# Altium PCB GSMMHMUltraSlim.PcbDoc
Units mm, origin at the board's own origin, x right, y up, seen from the top; angles counter-clockwise.
Board outline 30 x 20 mm, 2 copper layers (Top Layer, Bottom Layer); 23 components, 31 nets, 143 pads, 100 vias.
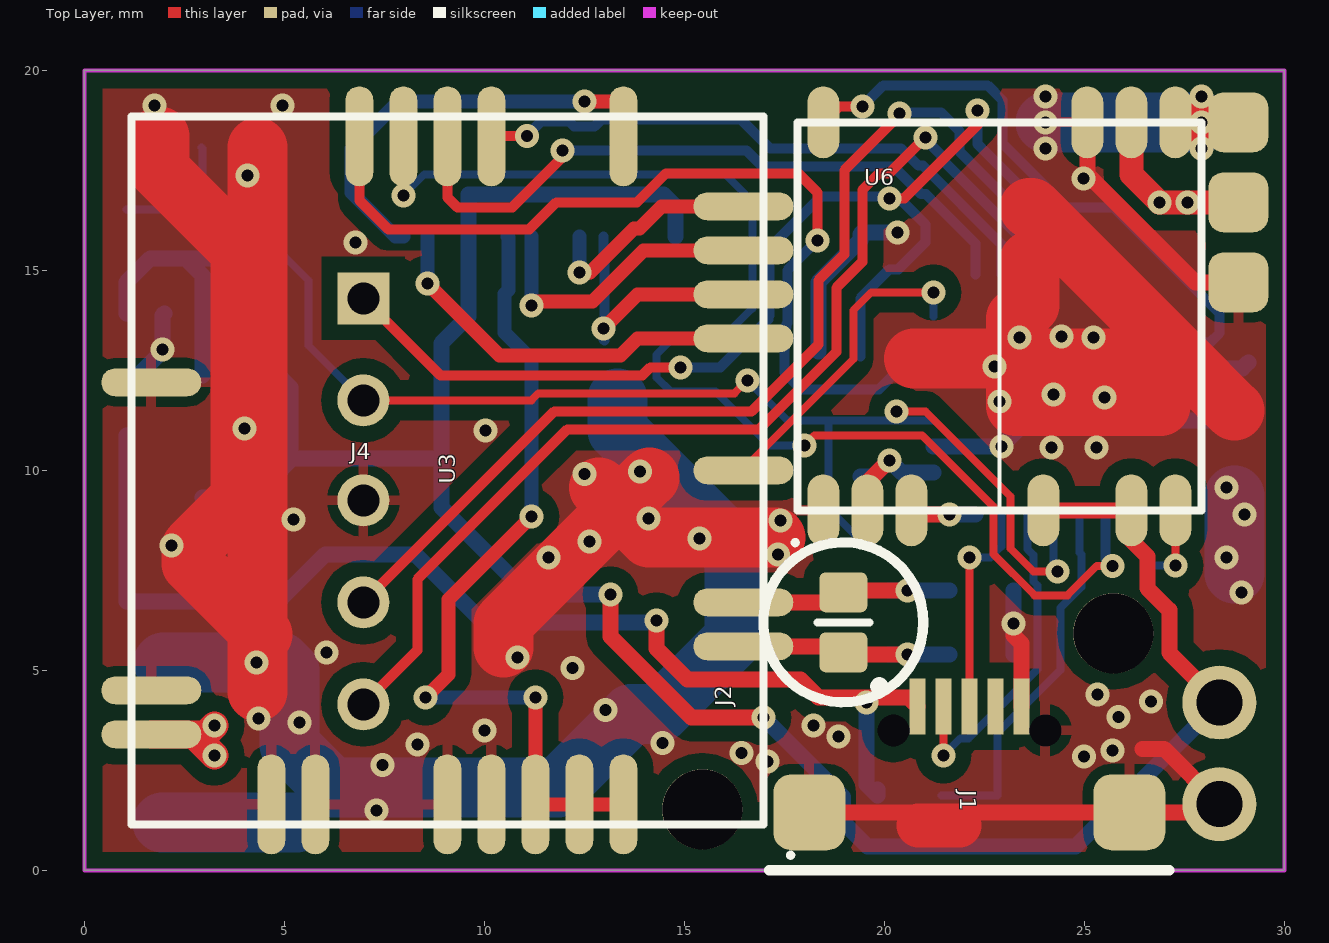
[diagram p0: Top Layer view]
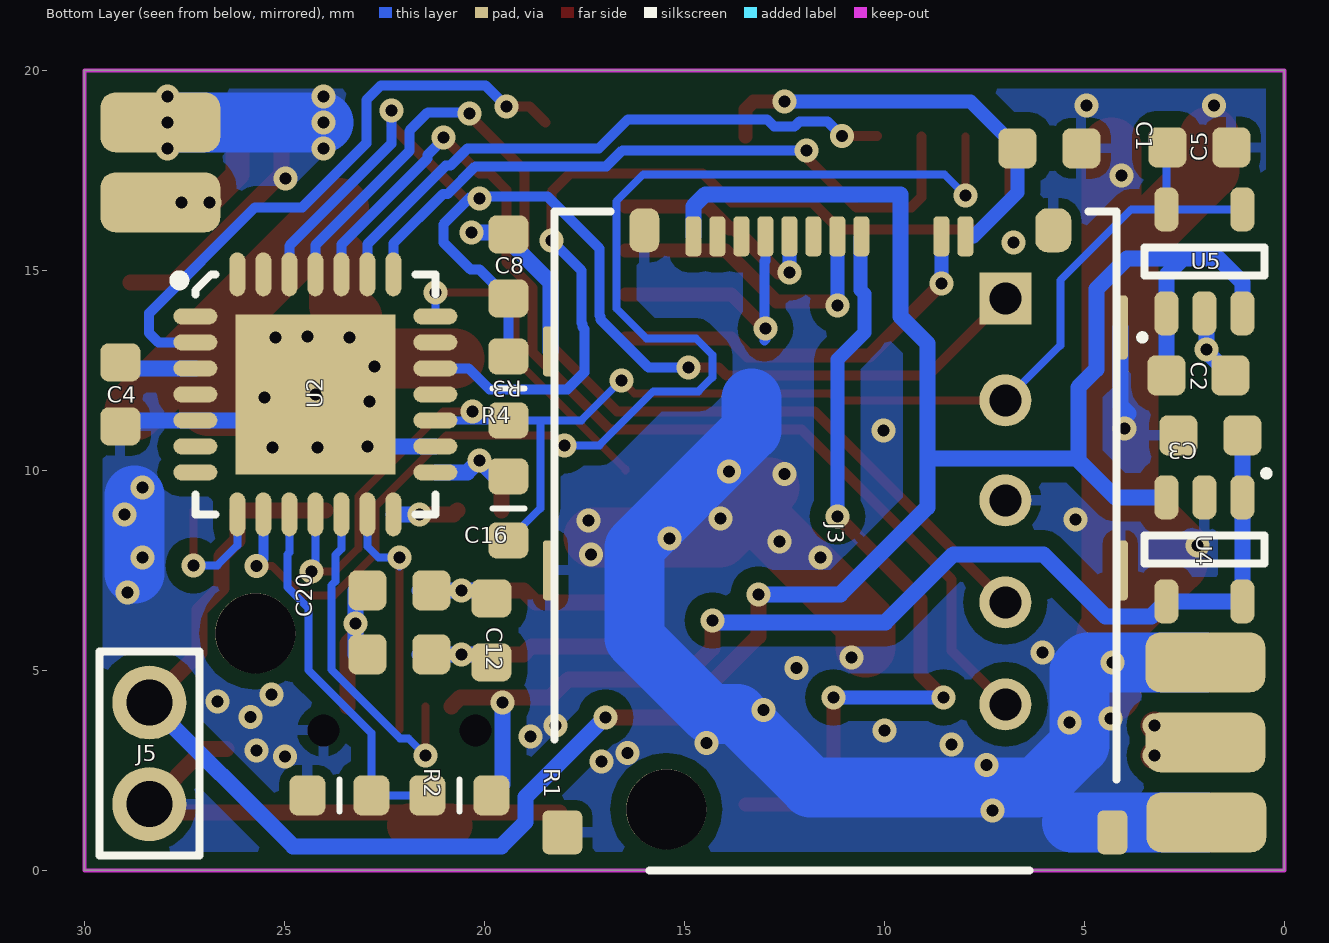
[diagram p1: Bottom Layer view, seen from below]
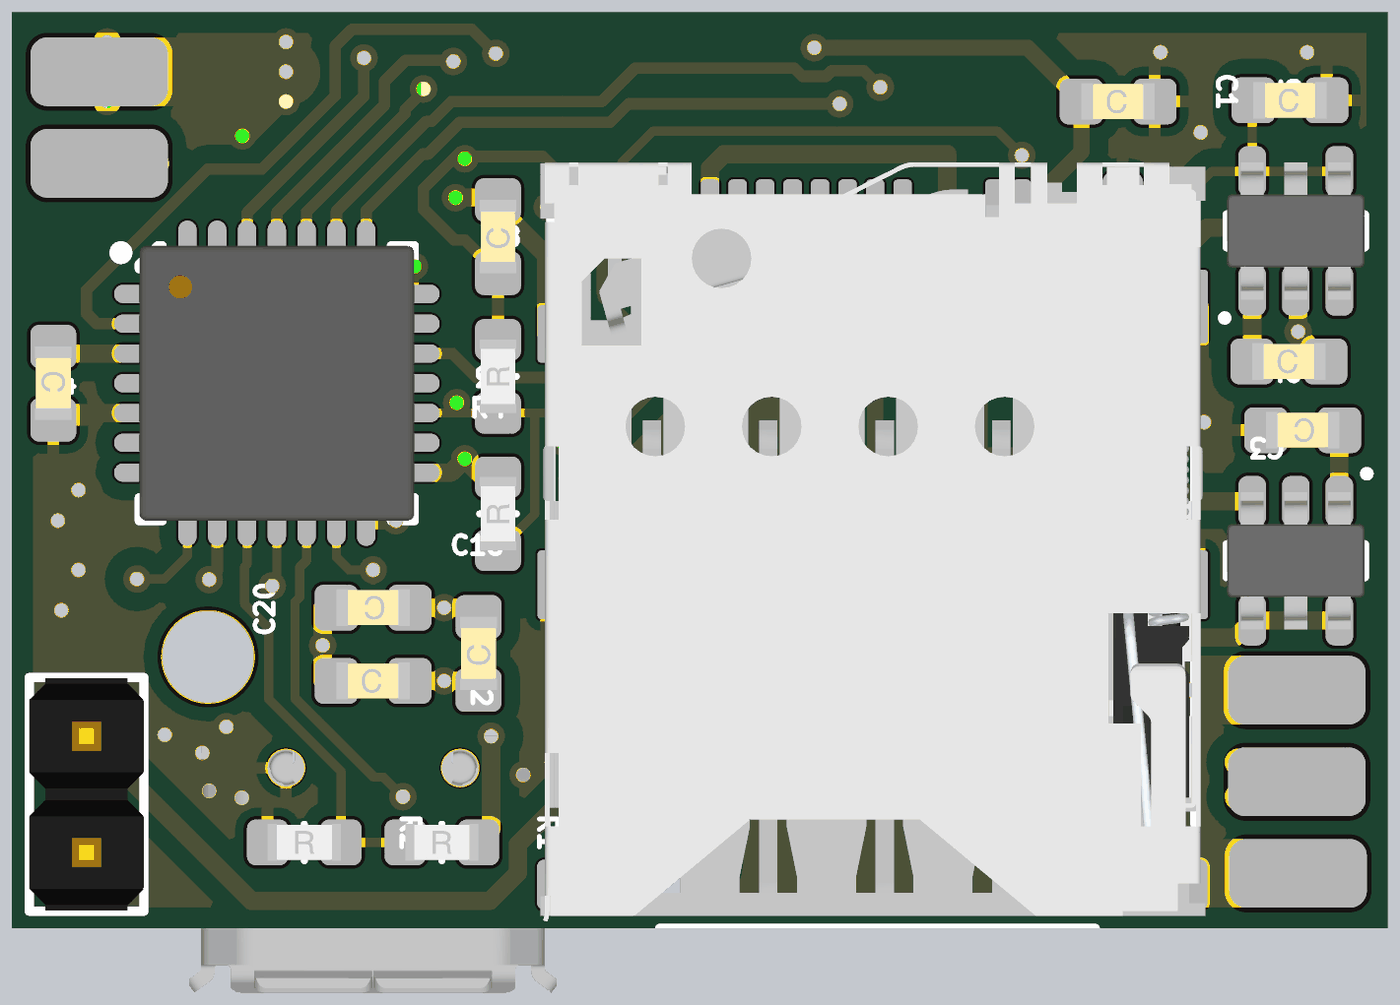
[diagram p2: 3D render of the assembled board from below, using the file's embedded part models]

## Layer stack, top to bottom
Top Solder: solder mask 0.0102, Solder Resist, Dk 3.5
Top Layer: signal copper 0.0356
Dielectric 1: dielectric 0.32, FR-4, Dk 4.8
Bottom Layer: signal copper 0.0356
Bottom Solder: solder mask 0.0102, Solder Resist, Dk 3.5

## Board outline
0,0 0,20 30,20 30,0

## Design rules (kind name [scope] priority, off if disabled: settings)
Clearance Clearance_110V_Keepout [InNetClass('110V') vs OnLayer('Keep-Out Layer')] p1: gap=0.3
Clearance Clearance_Q1Q2Q3 [(InComponent('Q1') OR InComponent('Q2') OR InComponent('Q3')) vs (InComponent('Q1') OR InComponent('Q2') OR InComponent('Q3'))] p2: gap=1
Clearance Clearance_110V_NoNet [InNetClass('110V') vs InNet('No Net')] p3: gap=0.5
Clearance Clearance_220V_110V [InNetClass('220V') vs InNetClass('110V')] p4: gap=1
Clearance Clearance_240VAC_220V [InNet('240VAC') vs InNetClass('220V')] p5: gap=1
Clearance Clearance_Poly [All vs InPolygon] p6: gap=0.4
Clearance Clearance_TrackAll [All vs IsTrack] p7: gap=0.2
Clearance Clearance_TrackU4 [InComponent('U4') vs IsTrack] p8: gap=0.25
Clearance Clearance_220V [InNetClass('220V')] p9: gap=2
Clearance Clearance_110V [InNetClass('110V')] p10: gap=1
Clearance [All] p11: gap=0.2
ComponentClearance [All] p1 off: gap=0.254 collisioncheckmode=3 verticalgap=0.254 showdistances=FALSE
Height [All] p1 off: minheight=0 maxheight=25.4 prefheight=12.7
PolygonConnect PolygonConnect_GND [All vs IsVia] p1: connectstyle=Direct reliefconductorwidth=0.254 reliefentries=4 polygonreliefangle="90 Angle" airgapwidth=0.254
PolygonConnect [All] p2: connectstyle=Relief reliefconductorwidth=0.254 reliefentries=4 polygonreliefangle="90 Angle" airgapwidth=0.254
RoomDefinition GSMMHMUltraSlim [InComponentClass('GSMMHMUltraSlim')] p1 off: confinementstyle=ConfineIn formatcopy=TRUE lockcomponents=FALSE outline 152.543,1.651 410.48,1.651 410.48,36.449 152.543,36.449
RoutingVias [All] p1: holewidth=0.711 width=1.27 viastyle="Through Hole" minholewidth=0.711 minwidth=1.27 maxholewidth=0.711 maxwidth=1.27
SolderMaskExpansion [All] p1: expansion=0.102
UnpouredPolygon [All] p1: allowunpoured=FALSE
Width [All] p1: maxlimit=5 minlimit=0.2 preferedwidth=0.5
27 further rules are at their usual default settings.

## Components (designator, comment, footprint, x,y, rotation, side; value= is the part's Value field where it differs from the comment)
C1 "1uF" SMD_0603_CAPC1608X95N 5.875,18.05 r180 bottom
C2 "1uF" SMD_0603_CAPC1608X95N 2.15,12.375 r180 bottom
C3 "1uF" SMD_0603_CAPC1608X95N 1.85,10.875 r0 bottom
C4 "4.7uF" SMD_0603_CAPC1608X95N 29.1,11.9 r270 bottom
C5 "4.7uF" SMD_0603_CAPC1608X95N 2.125,18.075 r180 bottom
C8 "100nF" SMD_0603_CAPC1608X95N 19.4,15.1 r90 bottom
C12 "33pF" SMD_0603_CAPC1608X95N 22.125,5.4 r180 bottom
C16 "33pF" SMD_0603_CAPC1608X95N 19.825,6 r90 bottom
C20 "33pF" SMD_0603_CAPC1608X95N 22.125,7 r0 bottom
J1 "ATTEND 207A-BBA0-R" SMD_CON_MICRO_USB 22.125,4.1 r270 top
J2 "CON_2PINS" SMD_MIC_4MM 18.975,6.2 r90 top
J3 "MICRO SIM" SMD_CON-WURTH_MICRO_SIM_693021010811 11.225,16.35 r180 bottom
J4 "CON_5PINS" "SIP5 - PGM" 6.975,9.225 r270 top
J5 "CON_2PINS" PTH_HDRV02W64P254_1X02 28.375,2.925 r90 bottom
R1 "20k" SMD_0603_RESC1608X55N 20.625,1.875 r180 bottom
R2 "20k" SMD_0603_RESC1608X55N 23.625,1.875 r180 bottom
R3 "2k" SMD_0603_RESC1608X55N 19.4,12.05 r90 bottom
R4 "20k" SMD_0603_RESC1608X55N 19.4,9.05 r90 bottom
U2 "PIC18F27J53_QFN" SMD_QFN65P600X600X100-29AN 24.225,11.9 r180 bottom
U3 "QUECTEL_M66" "SMD_MOD_M66-44N - NO UNUSED PINS" 9.075,10 r180 top
U4 "MCP73811 450mA" "SMD_SOT26_SOT95P285X140-5N - DLV" 2,8.025 r270 bottom
U5 "BU33TD3WG" "SMD_SOT26_SOT95P285X140-5N - DLV" 2,15.225 r90 bottom
U6 "QUECTEL_L76" "SMD_MOD_L76_SOIC110P970X1010-18N - NO UNUSED PINS" 22.875,13.85 r90 top

## Footprints (in the part's own frame and the unit in brackets; to place one, negate y for a bottom-side part, rotate by r counter-clockwise, add the part's x,y. Pads: shape width x height; smd on the part's side, far side on the other; paste and mask are expansions set on the pad)
PTH_HDRV02W64P254_1X02 [mm]
  round 1.85 hole 1.15 mask+0.075: 1(-1.27,0) 2(1.27,0)
  silkscreen extent -2.55,-1.25 2.55,1.25, body extent -2.54,-1.25 2.54,1.25, height 8
"SIP5 - PGM" [mm]
  rect 1.3x1.3 hole 0.8: 1(-5.075,0)
  round 1.3 hole 0.8: 2(-2.525,0) 3(-0.025,0) 4(2.525,0) 5(5.075,0)
SMD_0603_CAPC1608X95N [mm]
  rrect42% 0.95x1 smd mask+0.075: 1(-0.8,0) 2(0.8,0)
  body extent -0.8,-0.4 0.8,0.4, height 0.95
SMD_0603_RESC1608X55N [mm]
  rrect44% 0.9x1 smd mask+0.075: 1(-0.8,0) 2(0.8,0)
  silkscreen extent 0,-0.4 0,0.4, body extent -0.8,-0.4 0.8,0.4, height 0.55
SMD_CON-WURTH_MICRO_SIM_693021010811 [mm] "WURTH Micro SIM 693021010811"
  rrect50% 0.4x1 smd mask+0.05: 1(3.25,-0.5) 2(0.05,-0.5) 3(-1.15,-0.5) 4(-2.35,-0.5) 5(2.65,-0.5) 6(-0.55,-0.5) 7(-1.75,-0.5) 8(-2.95,-0.5) 9(-3.55,-0.5) 10(0.65,-0.5)
  rrect67% 0.75x1.1 smd mask+0.05: 11(-4.775,-0.35)
  rrect67% 0.9x1.1 smd mask+0.05: 12(5.45,-0.35)
  rrect44% 0.375x1.6 smd mask+0.05: 13(7.125,-2.775)
  rrect44% 0.375x1.5 smd mask+0.05: 14(7.125,-8.85) 17(-7.125,-8.85)
  rrect44% 0.75x1.1 smd mask+0.05: 15(6.925,-15.4)
  rrect33% 1x1.1 smd mask+0.05: 16(-6.825,-15.4)
  rrect44% 0.375x1.25 smd mask+0.05: 18(-7.125,-3.375)
  silkscreen extent -7.02,-16.35 7.02,0.13, body extent -7.25,-16.21 7.25,0.38, height 1.2
SMD_CON_MICRO_USB [mm]
  rect 1.4x0.4 smd: 1(0,-1.3) 2(0,-0.65) 3(0,0) 4(0,0.65) 5(0,1.3)
  round 0.7 hole 0.8: 6(0.6,1.9) 9(0.6,-1.9)
  rrect50% 1.9x1.8 smd: 7(2.65,4) 8(2.65,-4)
  silkscreen extent -0.6,-5 4.1,5, body extent -0.1,-4 5.5,4, height 2.7
SMD_MIC_4MM [mm] "TSB-4015AC1033"
  rrect33% 1x1.2 smd mask+0.075: 1(-0.75,0) 2(0.75,0)
  silkscreen extent -2,-2 2,2, body extent -1.98,-2 2,2, height 1.5
"SMD_MOD_L76_SOIC110P970X1010-18N - NO UNUSED PINS" [mm] "Quectel L76"
  oval 1.8x0.8 smd mask+0.075: 1(-4.85,4.4) 2(-4.85,3.3) 3(-4.85,2.2) 6(-4.85,-1.1) 8(-4.85,-3.3) 9(-4.85,-4.4) 10(4.85,-4.4) 11(4.85,-3.3) 12(4.85,-2.2) 18(4.85,4.4)
  silkscreen extent -5.77,-5.05 4.85,5.22, body extent -4.85,-5.05 4.85,5.05, height 2.52
"SMD_MOD_M66-44N - NO UNUSED PINS" [mm] "Quectel M66"
  oval 2.5x0.7 smd mask+0.075: 3(-7.4,4.4) 4(-7.4,3.3) 7(-7.4,0) 10(-7.4,-3.3) 11(-7.4,-4.4) 12(-7.4,-5.5) 13(-7.4,-6.6) 27(7.4,-2.2) 34(7.4,5.5) 35(7.4,6.6)
  oval 0.7x2.5 smd mask+0.075: 14(-4.4,-8.35) 17(-1.1,-8.35) 18(0,-8.35) 19(1.1,-8.35) 20(2.2,-8.35) 36(4.4,8.35) 37(3.3,8.35) 40(0,8.35) 41(-1.1,8.35) 42(-2.2,8.35) 43(-3.3,8.35) 44(-4.4,8.35)
  silkscreen extent -8.69,-8.85 7.9,9.73, body extent -7.9,-8.85 7.9,8.85, height 2.3
SMD_QFN65P600X600X100-29AN [mm]
  oval 1.1x0.4 smd mask+0.05: 1(-3,1.95) 2(-3,1.3) 3(-3,0.65) 4(-3,0) 5(-3,-0.65) 6(-3,-1.3) 7(-3,-1.95) 15(3,-1.95) 16(3,-1.3) 17(3,-0.65) 18(3,0) 19(3,0.65) 20(3,1.3) 21(3,1.95)
  oval 0.4x1.1 smd mask+0.05: 8(-1.95,-3) 9(-1.3,-3) 10(-0.65,-3) 11(0,-3) 12(0.65,-3) 13(1.3,-3) 14(1.95,-3) 22(1.95,3) 23(1.3,3) 24(0.65,3) 25(0,3) 26(-0.65,3) 27(-1.3,3) 28(-1.95,3)
  rect 4x4 smd paste-0.95 mask+0.05: 29(0,0)
  silkscreen extent -3.53,-3 3,3, body extent -3,-3 3.01,3.01, height 1
"SMD_SOT26_SOT95P285X140-5N - DLV" [mm]
  rrect67% 1.1x0.6 smd mask+0.075: 1(-1.3,0.95) 2(-1.3,0) 3(-1.3,-0.95) 4(1.3,-0.95) 5(1.3,0.95)
  silkscreen extent -2.05,-1.5 0.35,1.7, body extent -1.5,-1.5 1.5,1.5, height 1.2

## Part data
C1 C2 C3 C4 C5 C8 C12 C16 C20: library part C
J1: library part CON_USB_MINI
J3: library part CON_2ROWS_18PINS
R1 R2 R3 R4: library part R
U2: library part IC_PIC18F27J53_QFN
U3: library part MOD_QUECTEL_M66
U4: "MCP73812"
U5: library part IC_BU33TD3WG
U6: library part MOD_QUECTEL_L76

## Free pads (board coordinates)
  rrect50% 3x1.5 smd far side: 0(1.95,1.2) 0(1.975,3.2) 0(1.975,5.2) 0(28.1,16.7) 0(28.1,18.7)
  rrect50% 1.5x1.5 smd: 0(28.85,14.7) 0(28.85,16.7) 0(28.85,18.7)
  round 2 hole 2: 1(15.45,1.525) 1(25.725,5.925)

## Via types
v1: diameter 0.6, hole 0.3, Top Layer to Bottom Layer, tented both sides, 100 vias

## Nets (pads, with @x,y where several pads share a name; then routed paths per layer and width w, separated by ;. In a path a pad name is that pad's centre, name@x,y a point inside that pad or via, vN(x,y) a via of type N, cw(c..) or ccw(c..) an arc to the next point about the centre after c; other vN are vias at no path point)
3.3V: C5.1 J4.2 R3.1 R4.1 U2.11 U2.17 U5.4 U5.5 | length 36.6
  Top Layer w0.2: J4.2 11.175,11.75 11.35,11.925 16.25,11.925 v1(16.575,12.25) ; v1(20.3,11.475) 21.025,11.475 23.15,9.35 23.15,8.05 23.725,7.475 v1(24.325,7.475)
  Bottom Layer w0.2: U5.4 U5.5 ; C5.1 2.95,18.05 U5.5 ; J4.2 5.6,13.125 5.6,14.75 3.825,16.525 U5.5 ; v1(16.575,12.25) 17.575,11.25 18.6,11.25 ; R4.1 18.6,9.05 18.6,11.25 ; U2.17 R3.1 18.6,11.25 ; U2.11 24.225,7.613 v1@24.363,7.475 ; v1(24.325,7.475) v1@24.401,7.475
4.0V: C2.1 J3.9 J5.2 U4.3 U5.1 U5.3 U6.6 U6.8 | length 67.5
  Top Layer w0.4: v1(13.15,6.9) 13.15,5.851 15.176,3.825 v1(16.975,3.825) ; U6.6 U6.8 26.175,8.25 26.575,7.85 26.575,7.055 27.125,6.505 27.125,5.445 J5.2
  Bottom Layer w0.4: U5.3 1.05,14.7 1.65,15.3 2.525,15.3 ; U4.3 4.225,9.325 5.15,10.25 ; C2.1 U5.1 2.95,14.875 2.525,15.3 ; 8.875,10.3 5.2,10.3 5.15,10.25 ; 8.925,12.05 8.925,13.175 ; v1(13.15,6.9) 11.1,6.9 8.925,9.075 8.925,13.175 ; J3.9 14.775,16.6 14.475,16.9 9.6,16.9 9.6,13.85 8.925,13.175 ; v1(16.975,3.825) 18.966,1.834 18.966,1.209 19.575,0.6 24.78,0.6 J5.2 ; 2.525,15.3 3.93,15.3 4.7,14.53 4.7,12.525 5.15,12.075 5.15,10.25
5.0V: C3.1 J1.1 J1.9 R1.2 U4.1 U4.4 U4.5 | length 29.3
  Top Layer w0.4: v1(14.3,6.25) 14.3,5.55 15.075,4.775 17.9,4.775 18.35,4.325 20.6,4.325 J1.1
  Bottom Layer w0.4: C3.1 U4.1 U4.5 U4.4 3.325,6.35 4.475,6.35 6.025,7.9 8.275,7.9 9.975,6.2 14.25,6.2 v1(14.3,6.25) ; v1(19.55,4.195) 19.55,2.15 R1.2 R1.2@19.825,2.025
DM/D-: J1.2 U2.12 | length 8.4
  Top Layer w0.2: v1(21.475,2.875) J1.2
  Bottom Layer w0.2: v1(21.475,2.875) 21.9,3.3 22.107,3.3 23.825,5.018 23.825,7.126 23.725,7.226 23.725,7.883 23.575,8.033 U2.12
DP/D+: J1.3 U2.13 | length 6.1
  Top Layer w0.2: J1.3@22.125,3.525 v1(22.125,7.825)
  Bottom Layer w0.2: v1@22.125,7.6 22.35,7.825 22.65,7.825 22.925,8.1 U2.13
FORCE_ON: U2.2 U6.18 | length 15
  Top Layer w0.25: U6.18 18.875,19.1 v1(19.45,19.1)
  Bottom Layer w0.25: v1(19.45,19.1) 19.975,19.625 22.584,19.625 22.95,19.259 22.95,18.175 24.55,16.575 25.734,16.575 28.379,13.929 28.379,13.429 28.15,13.2 U2.2
GND: C1.2 C2.2 C3.2 C4.2 C5.2 C8.2 C12.1 C20.2 J1.5 J1.6 J1.7 J1.8 J3.11 J3.12 J3.13 J3.14 J3.15 J3.16 J3.17 J3.18 J4.3 J5.1 pad.0@1.95,1.2 pad.0@1.975,5.2 pad.0@28.1,18.7 pad.0@28.85,14.7 pad.0@28.85,18.7 R2.1 U2.5 U2.16 U2.29 U3.27 U3.34 U3.36 U3.37 U3.40 U3.41 U4.2 U5.2 U6.1 U6.10 U6.12 | length 141.4
  Top Layer w0.4: J1.8 J1.7 28.17,1.45 J5.1 26.996,3.034 26.45,3.034 ; v1(23.225,6.175) 23.225,5.875 23.425,5.675 J1.5 ; U6.12 25.075,17.4 27.775,14.7 pad.0@28.85,14.7 ; pad.0@28.225,18.35 28.2,18.325 27.65,18.325 27.4,18.575 28.85,18.575 pad.0@28.85,18.7 ; pad.0@28.85,18.7 28.85,18.725 28.55,19.025 27.6,19.025 U6.10 v1(27.925,18.7) pad.0@28.85,18.7
  Top Layer w1.1: 20.85,1.125 21.879,1.125
  Top Layer w1.5: 1.875,18.35 1.875,17.509 3.9,15.484 3.9,9.3 2.675,8.075 2.675,7.675 4.325,6.025 ; 4.325,4.475 4.325,6.025 ; 4.325,18.075 4.325,6.025 ; 4.45,5.9 4.325,6.025 ; 10.475,5.575 10.475,6.177 v1@14.123,9.825 ; 12.867,9.575 13.37,9.072 14.117,8.325 17.275,8.325 ; 20.74,12.8 23.294,12.8 ; 23.635,15.235 23.635,14.135 23.294,13.794 23.294,12.8 ; 23.635,16.56 23.683,16.56 27.444,12.8 ; 26.9,11.61 23.294,11.61 23.294,12.8 ; 28.75,11.494 27.444,12.8 ; 23.294,12.8 27.444,12.8
  Bottom Layer w0.4: C2.2 1.95,12.975 v1(1.95,13.025) 1.95,13.875 U5.2 ; 3.9,11.425 4.1,11.625 J3.13 ; J3.18 18.35,14.7 19.4,15.75 C8.2 19.45,15.95 v1(20.325,15.95) ; U2.16 v1(22.925,10.6) v1(24.225,11.9) 24.875,11.25 U2.5 C4.2@28.95,11.25 ; C12.1@23.225,5.4 v1(23.225,6.175) C20.2@23.225,7
  Bottom Layer w1.5: pad.0@1.95,1.2 5.31,1.2 ; pad.0@1.975,5.2 4.926,5.2 5.126,5 5.126,3.139 6.19,2.075 11.843,2.075 13.671,3.903 14.347,3.903 16.25,5.806 16.25,8.075 13.325,11 13.325,11.8 ; v1(24.025,18.7) v1(27.925,18.7) ; 28.75,7.425 v1@28.75,9.375
  other v1: 7.3,1.5 7.45,2.636 17.075,2.726 24.989,2.85 16.425,2.929 25.7,3 8.325,3.141 14.45,3.189 18.85,3.35 10,3.5 18.225,3.625 5.375,3.7 4.35,3.8 25.85,3.83 13.025,4.013 26.67,4.225 25.325,4.4 12.2,5.054 4.3,5.2 10.825,5.325 6.05,5.45 28.925,6.943 11.6,7.825 28.55,7.825 17.338,7.9 2.175,8.117 12.625,8.218 15.375,8.291 17.4,8.75 5.225,8.775 14.1,8.8 29,8.9 28.55,9.568 12.5,9.903 13.888,9.975 24.175,10.575 25.3,10.575 10.025,11.001 4,11.05 22.875,11.725 25.5,11.825 22.75,12.6 23.375,13.325 25.225,13.325 24.425,13.35 6.775,15.7 24.975,17.3 4.075,17.375 24.025,18.05 27.925,18.05 1.752,19.125 4.95,19.125 24.025,19.35 27.925,19.35
GPS_ANT: pad.0@28.1,16.7 pad.0@28.85,16.7 U6.11 | length 4.3
  Top Layer w0.6: U6.11 26.175,17.4 v1(26.875,16.7) pad.0@28.85,16.7
  other v1: 27.575,16.7
GPS_RST: U2.8 U6.9 | length 3.5
  Top Layer w0.2: v1(27.275,7.625) U6.9
  Bottom Layer w0.2: U2.8 26.175,8.126 26.676,7.625 v1(27.275,7.625)
GPS_RX: U2.14 U6.3 | length 1.6
  Top Layer w0.4: U6.3 20.775,8.9 v1(21.625,8.9)
  Bottom Layer w0.4: v1(21.625,8.9) U2.14
GPS_TX: R4.2 U2.15 U6.2 | length 3.6
  Top Layer w0.4: U6.2 19.575,9.7 v1(20.125,10.25)
  Bottom Layer w0.4: R4.2 19.725,9.85 v1(20.125,10.25) 20.425,9.95 U2.15
GSM_DTR: U2.9 U3.19 | length 33
  Top Layer w0.2: v1(7.975,16.875) U3.19 ; v1(18,10.625) 18.25,10.875 20.943,10.875 22.725,9.093 22.725,7.909 23.759,6.875 24.574,6.875 25.312,7.613 v1(25.7,7.613)
  Bottom Layer w0.2: v1(7.975,16.875) 8.5,17.4 16.025,17.4 16.7,16.725 16.7,14.05 15.95,13.3 14.712,13.3 14.3,12.888 14.3,12.326 14.651,11.975 15.775,11.975 17.125,10.625 v1(18,10.625)
  Bottom Layer w0.25: U2.9 25.525,7.788 v1(25.7,7.613)
GSM_PWRKEY: U2.21 U3.7 | length 7.9
  Top Layer w0.2: U3.7 16.475,10.029 19.225,12.779 19.225,14 19.675,14.45 v1(21.225,14.45)
  Bottom Layer w0.2: U2.21 v1(21.225,14.45)
GSM_RI: U2.19 U3.20 | length 23.1
  Top Layer w0.25: U3.20 6.875,16.75 7.6,16.025 11.125,16.025 11.8,16.7 13.818,16.7 14.543,17.425 17.85,17.425 18.325,16.95 v1(18.325,15.75)
  Bottom Layer w0.25: v1(18.325,15.75) 17.575,15 17.575,13.688 17.55,13.663 17.55,13.589 17.5,13.539 17.5,12.45 17.925,12.025 19.869,12.025 20.394,12.55 U2.19
GSM_RX: U2.22 U3.18 | length 17.3
  Top Layer w0.25: U3.18 9.075,16.825 9.325,16.575 10.7,16.575 11.95,17.825 v1(11.95,18)
  Bottom Layer w0.25: v1(11.95,18) 16.55,18 16.95,17.6 20.225,17.6 20.921,16.904 21.039,16.904 22.275,15.668 U2.22
GSM_TX: U2.23 U3.17 | length 15.1
  Top Layer w0.25: U3.17@10.188,18.362 v1(11.063,18.362)
  Bottom Layer w0.25: v1(11.063,18.362) 11.425,18.725 12.116,18.725 12.241,18.6 12.759,18.6 12.934,18.775 16.411,18.775 17.136,18.05 20.416,18.05 20.851,17.615 20.965,17.615 22.925,15.654 U2.23
GSM_VDD: J3.10 U3.42 U3.43 U3.44 | length 20.6
  Top Layer w0.35: v1@8.475,4.275 v1(8.525,4.325) 9.1,4.9 9.1,6.775 v1(11.175,8.85) ; v1(11.275,4.325) U3.42 U3.43 U3.44
  Bottom Layer w0.35: v1(8.525,4.325) v1(11.275,4.325) ; J3.10 10.6,15.825 10.6,14.505 10.5,14.405 10.5,13.45 11.175,12.775 v1(11.175,8.85)
MCLR: C8.1 J4.1 R3.2 U2.26 | length 30.6
  Top Layer w0.25: J4.1 8.9,12.375 13.95,12.375 14.15,12.575 v1(14.9,12.575) ; v1(20.125,16.8) 20.5,16.8 22.325,18.625 v1(22.325,19)
  Bottom Layer w0.25: v1(14.9,12.575) 15.9,12.575 17.1,13.775 17.1,13.849 17.125,13.874 17.125,15.55 18.425,16.85 20.325,16.85 21.025,16.15 21.025,15.7 20.35,15.025 20.125,15.025 C8.1 R3.2 ; v1(22.325,19) 22.325,18.164 24.875,15.614 U2.26
MICN: C16.2 C20.1 J2.2 U3.4 | length 5.7
  Top Layer w0.4: U3.4 18.725,6.7 J2.2 19.025,7 v1(20.575,7)
  Bottom Layer w0.4: C16.2@20.125,7 20.875,7 C20.1@21.625,7
MICP: C12.2 C16.1 J2.1 U3.3 | length 5.7
  Top Layer w0.4: U3.3 18.825,5.6 J2.1 19.025,5.4 v1(20.575,5.4)
  Bottom Layer w0.4: C16.1@20.125,5.4 20.875,5.4 C12.2@21.625,5.4
PGC: J4.5 U2.24 | length 27.4
  Top Layer w0.25: J4.5 8.325,5.5 8.325,7.275 12.075,11.025 16.87,11.025 18.8,12.955 18.8,14.564 19.45,15.214 19.45,17.009 19.866,17.425 20.125,17.425 v1(21.025,18.325)
  Bottom Layer w0.25: v1(21.025,18.325) 21.025,18.277 21.425,17.877 21.425,17.791 23.575,15.641 U2.24
PGD: J4.4 U2.25 | length 27
  Top Layer w0.25: J4.4 11.75,11.475 16.684,11.475 18.35,13.141 18.35,14.75 19,15.4 19,17.5 20.425,18.925 v1(20.375,18.925)
  Bottom Layer w0.25: v1(20.375,18.925) 20.4,18.95 21.414,18.95 21.875,18.489 21.875,17.977 24.225,15.627 U2.25
RF_ANT: pad.0@1.975,3.2 U3.35 | length 2.4
  Top Layer w0.7: U3.35 U3.35@2.725,3.4 ; v1(3.25,2.875) U3.35@2.725,3.4 ; v1(3.25,3.625) 3.025,3.4 U3.35@2.725,3.4
SIM_CLK: J3.3 U3.13 | length 5.7
  Top Layer w0.35: v1(12.375,14.95) 12.647,14.95 13.747,16.05 13.875,16.05 14.425,16.6 U3.13
  Bottom Layer w0.35: v1(12.375,14.95) J3.3
SIM_GND: J3.5 U3.10 | length 10
  Top Layer w0.35: v1(8.575,14.675) 10.375,12.875 13.409,12.875 13.834,13.3 U3.10
  Bottom Layer w0.35: v1(8.575,14.675) J3.5
SIM_IO: J3.7 U3.11 | length 6.8
  Top Layer w0.35: v1(12.975,13.55) 13.825,14.4 U3.11
  Bottom Layer w0.25: v1(12.975,13.55) 12.975,13.275 13,13.25 13,15.234 12.975,15.234 J3.7
SIM_RST: J3.2 U3.12 | length 7.6
  Top Layer w0.35: v1(11.175,14.125) 11.275,14.225 12.7,14.225 13.975,15.5 U3.12
  Bottom Layer w0.35: v1(11.175,14.125) J3.2
SIM_VDD: C1.1 J3.1 U3.14 | length 10.9
  Top Layer w0.35: v1(12.5,19.225) 13.275,19.225 13.475,19.025 U3.14
  Bottom Layer w0.35: J3.1 7.775,15.85 6.675,16.95 C1.1 7.85,19.225 v1(12.5,19.225)
SIM_VPP: J3.6
USB_SENSE: R1.1 R2.2 U2.10 | length 9.4
  Bottom Layer w0.2: R1.1 R2.2 22.825,3.43 24.4,5.005 24.4,6.555 24.925,7.08 24.925,7.9 24.875,7.95 U2.10@24.875,9
VCAP: C4.1 U2.3 | length 1.9
  Bottom Layer w0.4: U2.3 28.95,12.55 C4.1
pads on no net: J1.4 J3.4 J3.8 U2.1 U2.4 U2.6 U2.7 U2.18 U2.20 U2.27 U2.28

## Polygon pours and split planes (outlines as drawn)
GND on Top Layer "Top Layer-No Net" (solid, remove dead copper, pour order 7): 0,0.05 30,0.05 30,20 0,20
GND on Bottom Layer "Top Layer-No Net1" (solid, remove dead copper, pour order 8): 0,0 30,0 30,20 0,20

## Keep-outs
Keep-Out Layer:
  the board outline again, w0.1

## Text inside footprints (layer, text, board x,y; h text height)
J5: Mechanical 3 "1" at 27.425,0.615 h0.5 r270